# Altium PCB 中心连接板.PcbDoc
Units mm, origin at the board's own origin, x right, y up, seen from the top; angles counter-clockwise.
Board outline 46 x 40 mm, 2 copper layers (Top Layer, Bottom Layer); 17 components, 4 nets, 48 pads, 1 vias.
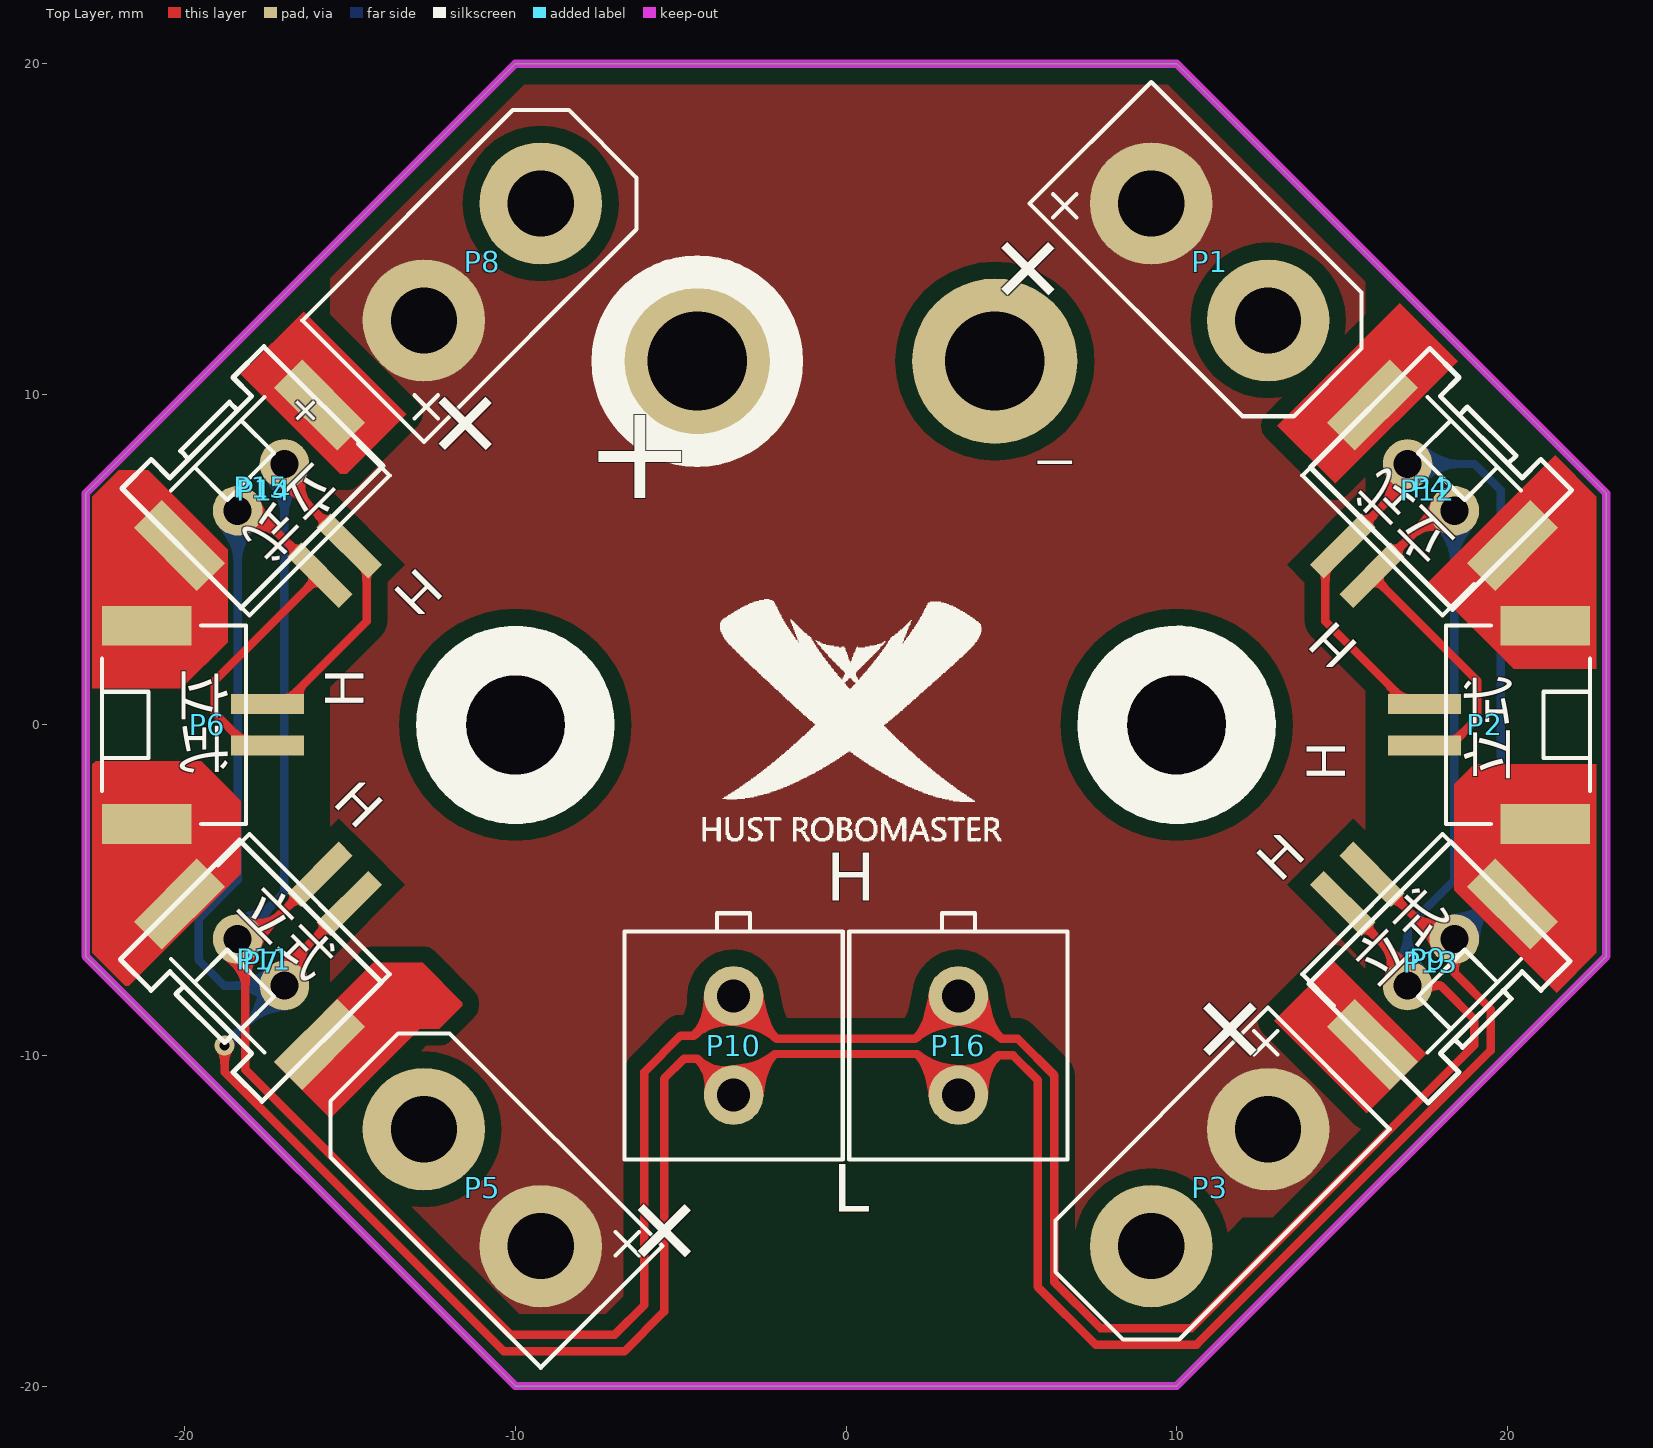
[diagram p0: Top Layer view]
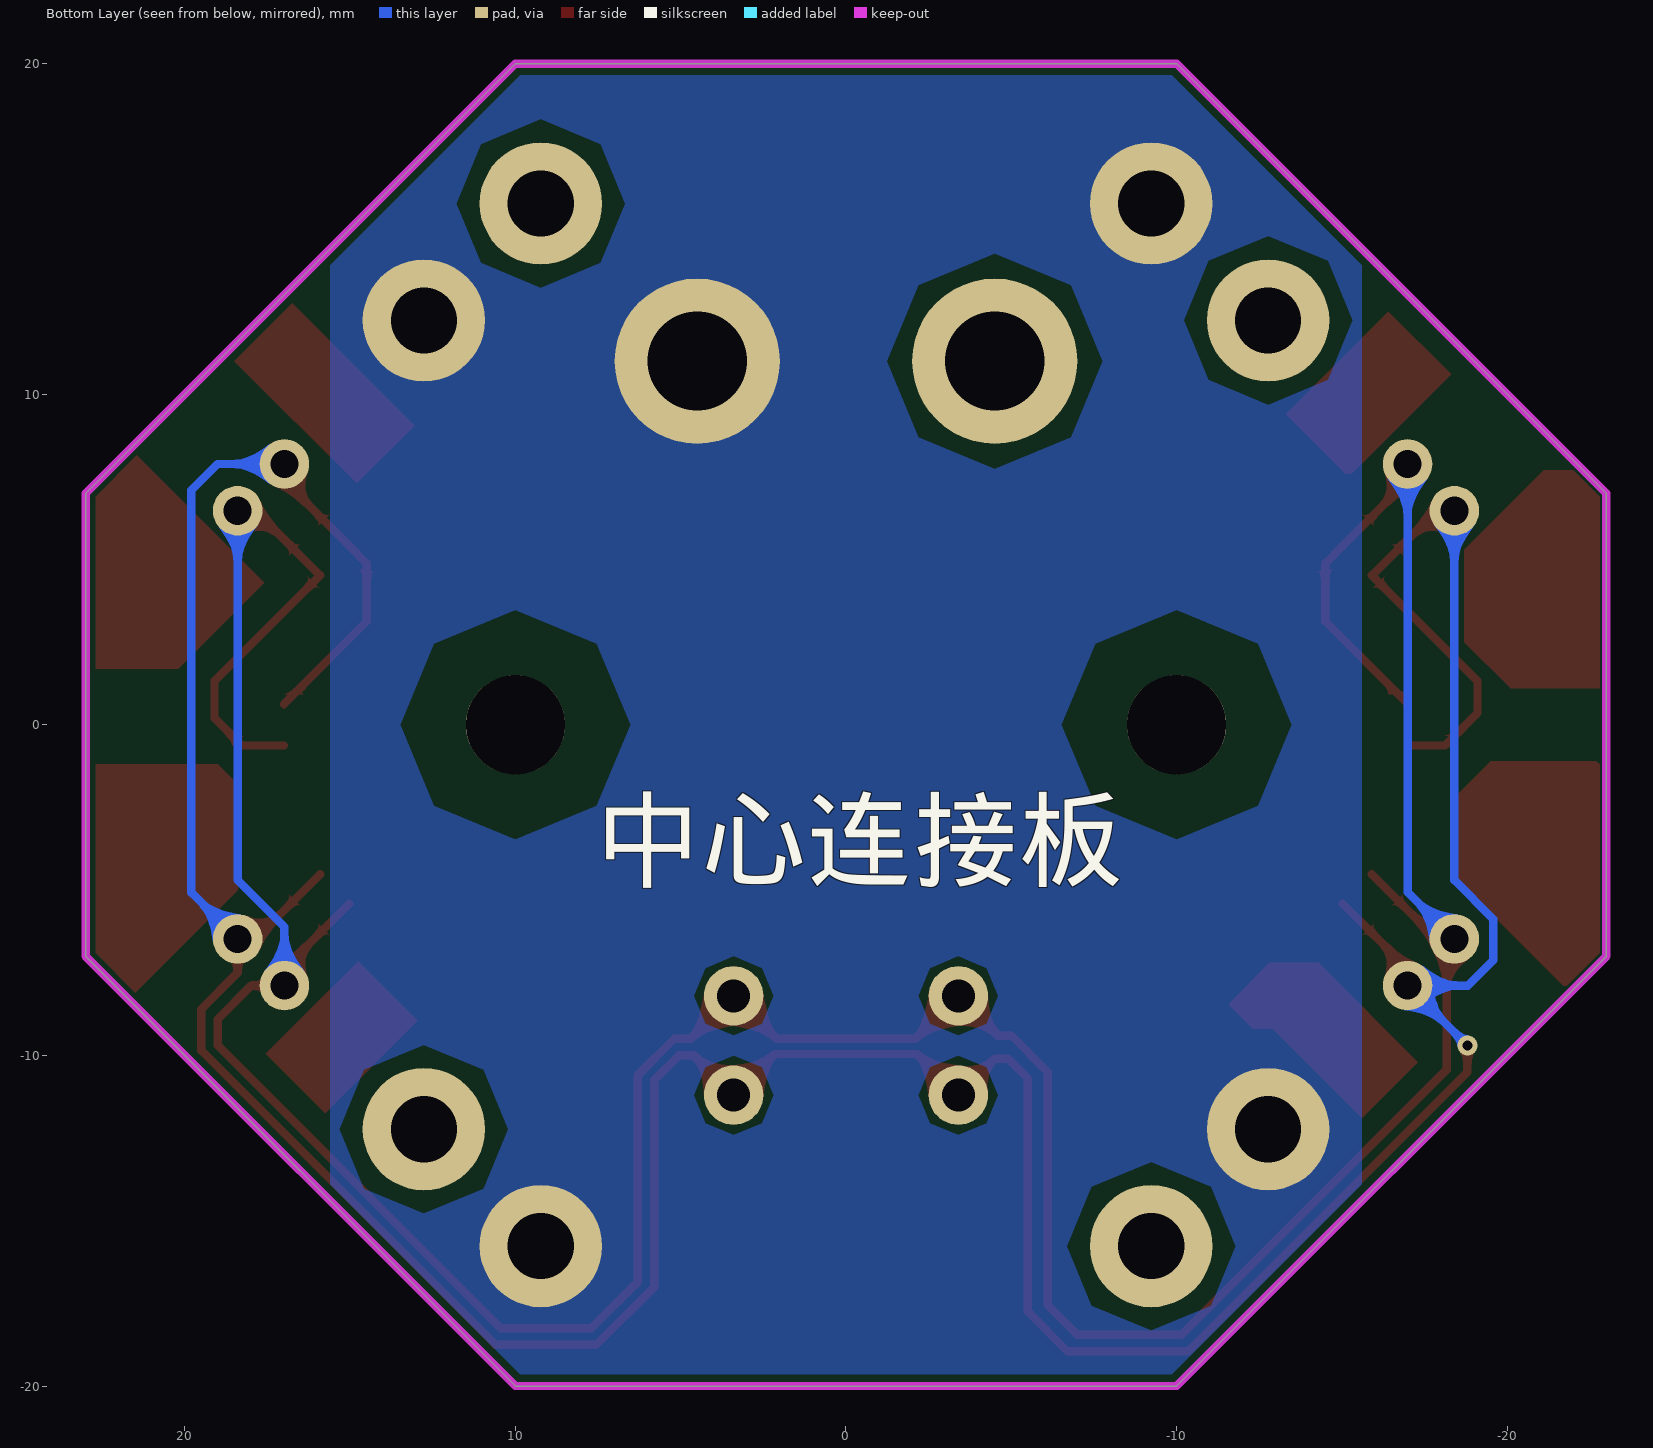
[diagram p1: Bottom Layer view, seen from below]
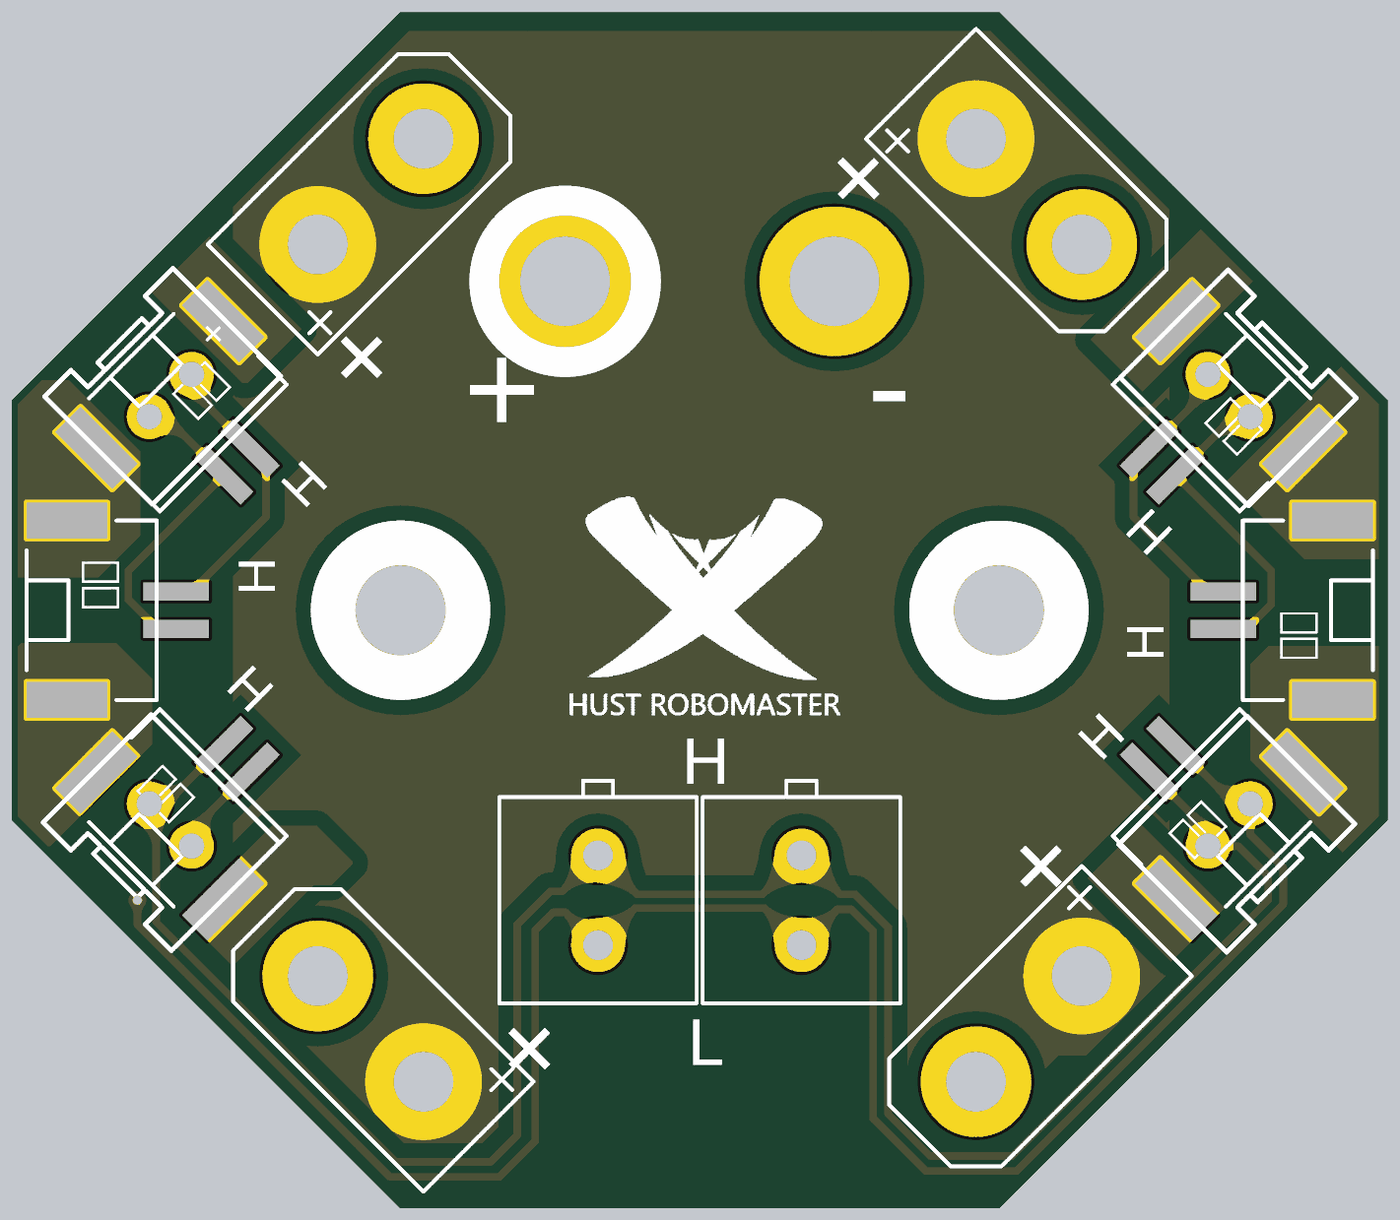
[diagram p2: 3D render of the assembled board from above, using the file's embedded part models]

## Layer stack, top to bottom
Top Solder: solder mask 0.0102, Solder Resist, Dk 3.5
Top Layer: signal copper 0.0356
Dielectric 1: dielectric 0.32, FR-4, Dk 4.8
Bottom Layer: signal copper 0.0356
Bottom Solder: solder mask 0.0102, Solder Resist, Dk 3.5

## Board outline
-23,-7 -10,-20 10,-20 23,-7 23,7 10,20 -10,20 -23,7

## Design rules (kind name [scope] priority, off if disabled: settings)
Clearance Clearance_1 [InNet('24V')] p1: gap=0.5
Clearance [All] p2: gap=0.203
ComponentClearance [All] p1: gap=0 collisioncheckmode=3 verticalgap=0 showdistances=FALSE
PolygonConnect [All] p1: connectstyle=Direct reliefconductorwidth=0.254 reliefentries=4 polygonreliefangle="90 Angle" airgapwidth=0.254
RoomDefinition 中心连接板 [InComponentClass('中心连接板')] p1: confinementstyle=ConfineIn formatcopy=TRUE lockcomponents=FALSE outline -116.84,-61.722 -66.04,-61.722 -66.04,-36.322 -116.84,-36.322
RoutingVias [All] p1: holewidth=0.711 width=1.27 viastyle="Through Hole" minholewidth=0.3 minwidth=0.6 maxholewidth=2 maxwidth=5
SolderMaskExpansion [All] p1: expansion=0.102
Width [All] p1: maxlimit=10 minlimit=0.203 preferedwidth=0.254 minimp=50.000000 maximp=50.000000 favimp=50.000000
29 further rules are at their usual default settings.

## Classes and differential pairs
component class 中心连接板: P1 P2 P3 P4 P5 P6 P7 P8 P9 P10 P11 P12 P13 P14 P15 P16

## Components (designator, comment, footprint, x,y, rotation, side; value= is the part's Value field where it differs from the comment)
P1 "XT30/60/90" XT30立式 11,14 r135 top
P2 "A1.25W-2F" GH1.25_立式 22.5,0 r90 top
P3 "XT30/60/90" XT30立式 11,-14 r45 top
P4 "HY2.0-2Y" "HY2.00MM 2X1_立式" 17.693,7.182 r315 top
P5 "XT30/60/90" XT30立式 -11,-14 r315 top
P6 "A1.25W-2F" GH1.25_立式 -22.5,0 r270 top
P7 "HY2.0-2Y" "HY2.00MM 2X1_立式" -17.693,-7.182 r135 top
P8 "XT30/60/90" XT30立式 -11,14 r225 top
P9 "A1.25W-2F" GH1.25_立式 19,-8.5 r45 top
P10 "MX3.0_2X1" MX3.0_2X1_立式 -3.4,-9.7 r0 top
P11 "A1.25W-2F" GH1.25_立式 -19,-8.5 r315 top
P12 "A1.25W-2F" GH1.25_立式 19,8.5 r135 top
P13 "HY2.0-2Y" "HY2.00MM 2X1_立式" 17.693,-7.182 r225 top
P14 "A1.25W-2F" GH1.25_立式 -19,8.5 r225 top
P15 "HY2.0-2Y" "HY2.00MM 2X1_立式" -17.693,7.182 r45 top
P16 "MX3.0_2X1" MX3.0_2X1_立式 3.4,-9.7 r0 top
? "Comment" "RM_logo 300mil*350" -0.1,0.8 r0 top

## Footprints (in the part's own frame and the unit in brackets; to place one, negate y for a bottom-side part, rotate by r counter-clockwise, add the part's x,y. Pads: shape width x height; smd on the part's side, far side on the other; paste and mask are expansions set on the pad)
GH1.25_立式 [mm]
  rect 1.2x2.7 smd: 0(-3,1.35) 0(3,1.35)
  rect 0.6x2.2 smd: 1(0.625,5) 2(-0.625,5)
  silkscreen extent -3,0 3,4.35, body extent -2.87,-0.06 2.88,5.04, height 4.13
"HY2.00MM 2X1_立式" [mm] "额定电流2A，额定电压250V"
  round 1.5 hole 0.85: 1(-1,0) 2(1,0)
  silkscreen extent -3,-2.15 3.07,2.95, body extent -3,-2.27 3,2.83, height 8.03
MX3.0_2X1_立式 [mm]
  round 1.8 hole 1: 1(0,1.5) 2(0,-1.5)
  silkscreen extent -3.3,-3.45 3.3,4
"RM_logo 300mil*350" [mm] "300mil*350mil"
  silkscreen extent -4.24,-4.3 4.8,2.99
XT30立式 [mm]
  round 3.7 hole 2: 1(2.5,0) 2(-2.5,0)
  silkscreen extent -5.1,-2.6 5.1,2.6

## Part data
P2 P6 P9 P11 P12 P14: library part GH1.25-2P
P4 P7 P13 P15: library part MX3.0_2X1

## Free pads (board coordinates)
  round 3 hole 3: 1(-10,0) 2(10,0)
  round 5 hole 3: 3(-4.5,11) 4(4.5,11)

## Via types
v1: diameter 0.6, hole 0.3, Top Layer to Bottom Layer, tented both sides, 1 vias

## Nets (pads, with @x,y where several pads share a name; then routed paths per layer and width w, separated by ;. In a path a pad name is that pad's centre, name@x,y a point inside that pad or via, vN(x,y) a via of type N, cw(c..) or ccw(c..) an arc to the next point about the centre after c; other vN are vias at no path point)
24V: P1.1 P3.1 P5.1 P8.1 pad.3
CAN1_H: P2.2 P4.2 P6.2 P7.2 P9.2 P10.1 P11.2 P12.2 P13.2 P14.2 P15.2 P16.1 | length 125.8
  Top Layer w0.254: P6.2@-17,0.625 -14.5,3.125 -14.5,4.884 P14.2 -16.986,7.37 P15.2 ; P11.2 -17.859,-6.475 P7.2 -18.166,-6.709 -18.166,-10.434 -10.15,-18.45 -7,-18.45 -6.1,-17.55 -6.1,-10.5 -5,-9.4 -4.6,-9.4 P10.1 -2.1,-9.5 2.1,-9.5 P16.1 4.7,-9.5 5.2,-9.5 6.3,-10.6 6.3,-16.853 7.697,-18.25 10.45,-18.25 19,-9.7 19,-8.9 17.989,-7.889 P13.2 16.986,-7.37 P9.2 ; P2.2@17,-0.625 P2.2 18.275,-0.625 19.1,0.2 19.1,1.329 P12.2 17.859,6.475 P4.2
  Bottom Layer w0.254: P7.2 -16.986,-5.061 P15.2 ; P13.2 16.986,-6.114 18.4,-4.7 P4.2
CAN1_L: P2.1 P4.1 P6.1 P7.1 P9.1 P10.2 P11.1 P12.1 P13.1 P14.1 P15.1 P16.2 | length 131.3
  Top Layer w0.254: v1(-18.797,-9.7) -18.797,-10.503 -10.35,-18.95 -6.7,-18.95 -5.5,-17.75 -5.5,-10.7 -4.9,-10.1 -4.5,-10.1 P10.2 -2.157,-9.957 2.157,-9.957 P16.2 4.6,-10 5.053,-10 5.8,-10.747 5.8,-17 7.55,-18.75 10.603,-18.75 19.5,-9.853 19.5,-8.6 18.4,-7.5 P13.1 17.859,-6.475 P9.1 ; P15.1 -17.859,6.475 P14.1 -19.1,1.329 -19.1,0.358 -18.117,-0.625 P6.1 P6.1@-17,-0.625 ; P7.1 -16.986,-7.37 P11.1 ; P4.1 16.986,7.37 P12.1 14.5,4.884 14.5,3.125 P2.1@17,0.625
  Bottom Layer w0.254: v1(-18.797,-9.7) P7.1 -18.811,-7.889 -19.575,-7.125 -19.575,-5.875 -18.4,-4.7 P15.1 ; P4.1 19.011,7.889 19.8,7.1 19.8,-5.075 P13.1
GND: P1.2 P3.2 P5.2 P8.2 pad.4
pads on no net: P2.0 P6.0 P9.0 P11.0 P12.0 P14.0

## Polygon pours and split planes (outlines as drawn)
GND on Top Layer "Top Layer-24V" (solid, pour order 54): -14.7,15.3
24V on Top Layer "Top Layer-No Net" (solid, remove dead copper, pour order 60): -15.6,-12.853 -15.6,13.7 -13.5,15.8 -9.3,20 10,20 15.7,14.3 15.7,-10.6 15.7,-12.3 13.8,-14.2 13.1,-14.9 12,-14.9 8.45,-18.45 -10.003,-18.45
GND on Bottom Layer "Bottom Layer-24V" (solid, remove dead copper, pour order 58): -15.6,14.5 -15.6,-14.5 -10.1,-20 9.9,-20 15.6,-14.3 15.6,14.3 9.9,20 -10.1,20

## Keep-outs
Keep-Out Layer:
  the board outline again, w0.254

## Other copper
Top Layer:
  region: -11.875,15.65
  region: -21.7,-7.9 -18.3,-4.5 -18.3,-2.3 -19.5,-1.1 -22.7,-1.1 -22.8,-1.2 -22.8,-6.9 -21.8,-7.9
  region: -17.3,-10.2 -14.3,-7.2 -12.8,-7.2 -11.6,-8.4 -11.6,-8.5 -12.3,-9.2 -12.9,-9.2 -15.6,-11.9
  region: -22.8,1.1 -20.1,1.1 -18.7,2.5 -18.7,5.3 -21.1,7.7 -22,7.7 -22.8,6.9
  region: -18.3,10.6 -15.3,7.6 -15.1,7.6 -13.3,9.4 -16.4,12.5
  region: 14.8,7.3 18.5,11 16.75,12.75 13.05,9.05
  region: 17.6,4.3 20.2,1.7 22.7,1.7 22.7,6.9 21.45,8.15
  region: 18.4,-5 21.5,-8.1 22.7,-6.9 22.7,-1.2 19,-1.2 18.4,-1.8
  region: 17.55,-9.95 15.75,-11.75 12.95,-8.95 14.75,-7.15

## Silkscreen, mask and mechanical layers (free items; w line width, h text height)
Top Overlay:
  circle w1: c-4.5,11 r2.7
  circle w1.5: c-10,0 r2.25
  lines w1.5: 12.25,0.039 ccw(c10,0) 12.25,0
  text "+" at 5.2,16 h4 r225
  text "+" at -16.221,8.652 h1.52 r45
  text "+" at -11.2,6.9 h4 r45
  text "-" at 5.6,6 h5
  text "+" at -7.9,5.9 h5
  text "H" at -13.2,5.1 h2 r225
  text "H" at 15,3.5 h2 r135
  text "H" at -14.2,0.5 h2 r90
  text "H" at 15.5,-1.7 h2 r90
  text "H" at -15,-3.5 h2 r315
  text "H" at 13.4,-5.1 h2 r45
  text "H" at -0.6,-5.8 h2.5
  text "+" at 11.3,-7 h4 r225
  text "+" at -5.8,-13.1 h4 r225
  text "L" at -0.4,-15.2 h2.5
Bottom Overlay:
  text "中心连接板" at 7.6,-5.4 h4

## Text inside footprints (layer, text, board x,y; h text height)
P2: Top Overlay "立式" at 20.4,-1.7 h2.03 r90
P6: Top Overlay "立式" at -20.4,1.7 h2.03 r270
P9: Top Overlay "立式" at 16.313,-8.217 h2.03 r45
P11: Top Overlay "立式" at -18.717,-5.813 h2.03 r315
P12: Top Overlay "立式" at 18.717,5.813 h2.03 r135
P14: Top Overlay "立式" at -16.313,8.217 h2.03 r225